# Altium PCB E-25 Microphone.PcbDoc
Units mil, origin at the board's own origin, x right, y up, seen from the top; angles counter-clockwise.
Board outline 646 x 1543 mil, 2 copper layers (Top Layer, Bottom Layer); 21 components, 11 nets, 55 pads, 6 vias.
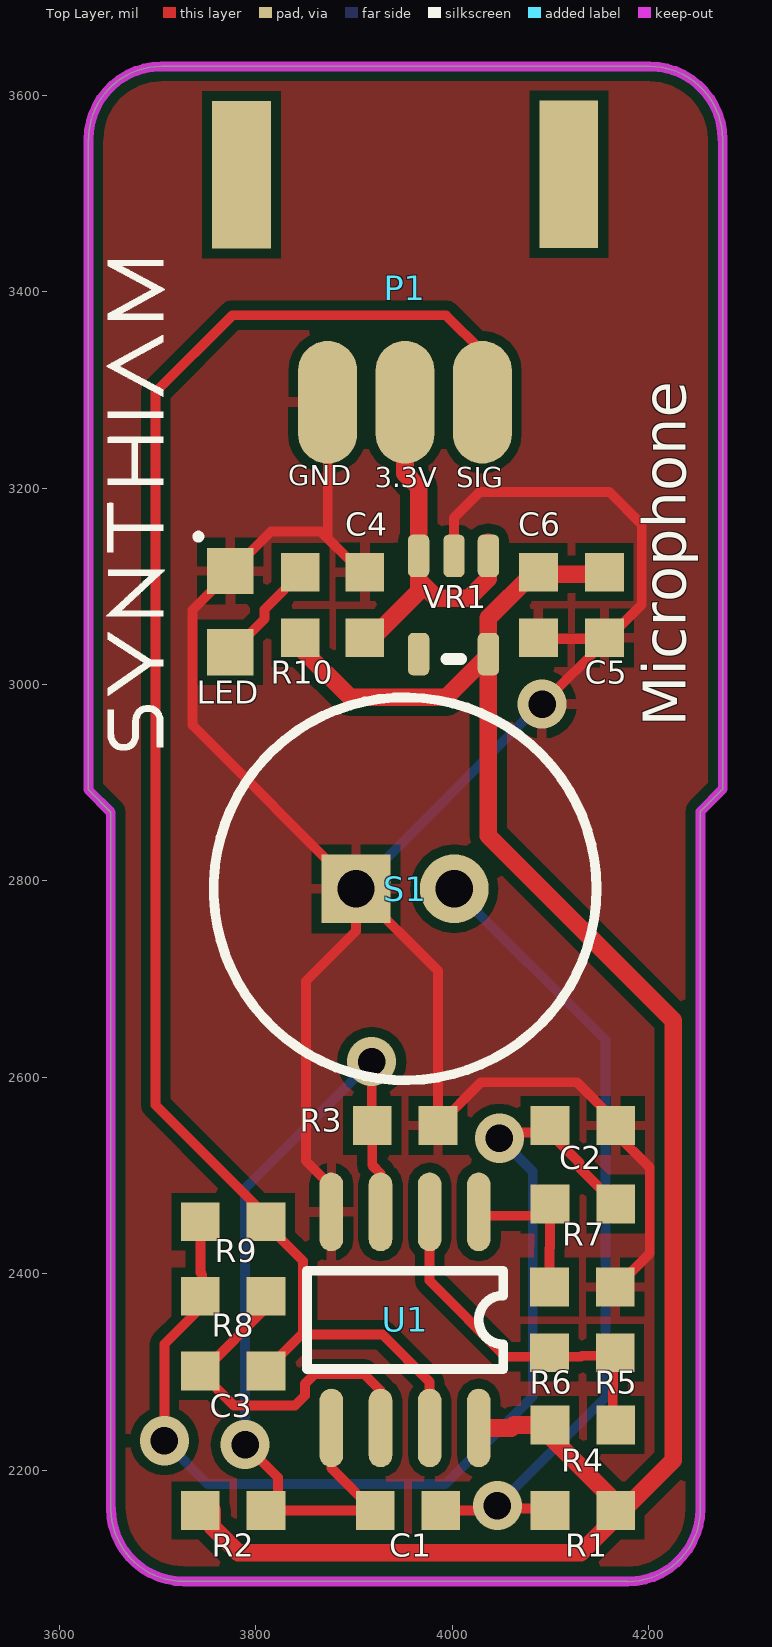
[diagram p0: Top Layer view]
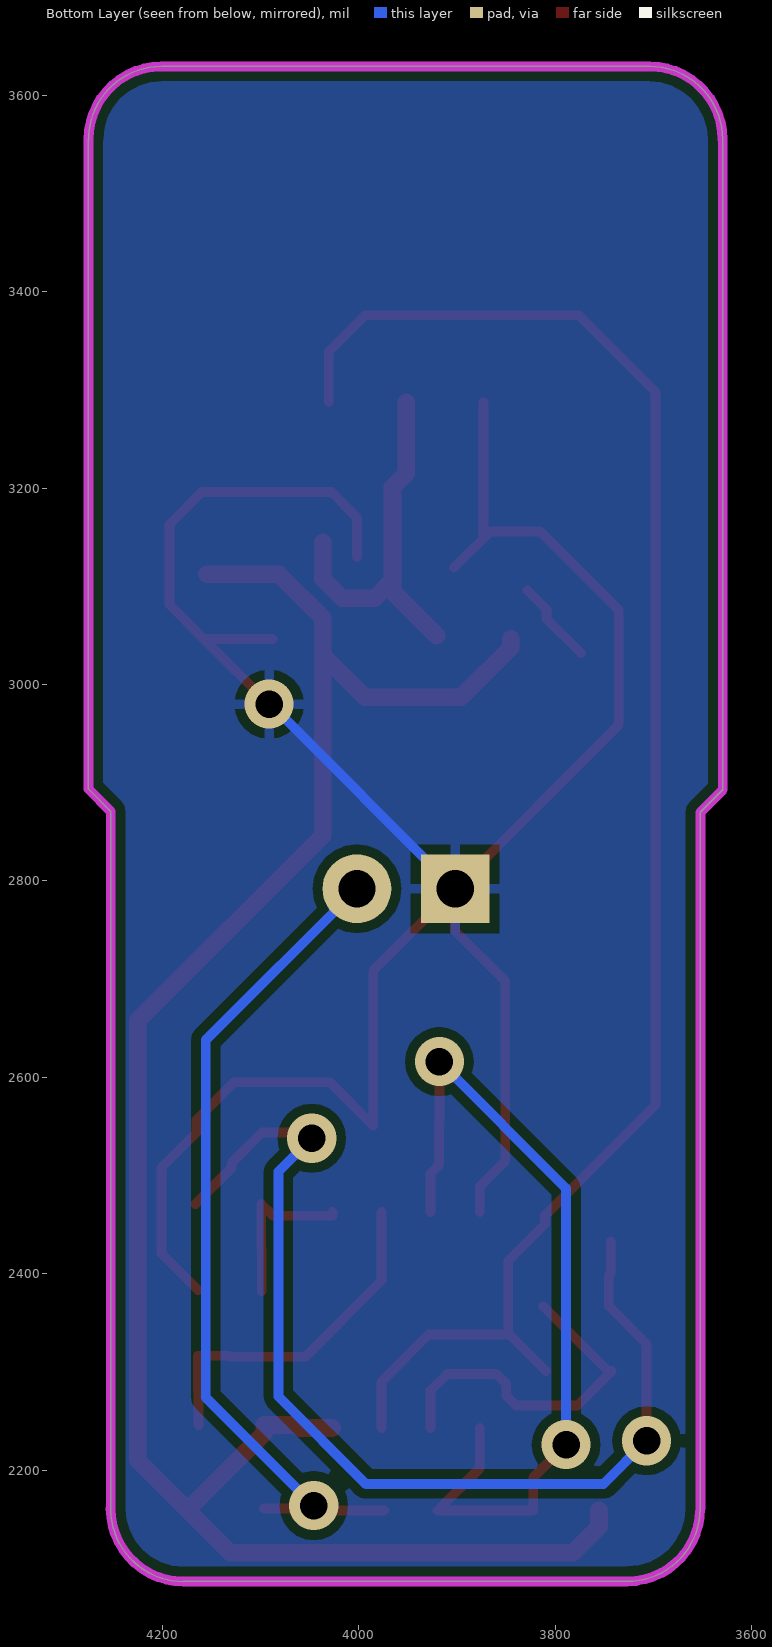
[diagram p1: Bottom Layer view, seen from below]

## Layer stack, top to bottom
Top Layer: signal copper 1.4
Dielectric: dielectric 12.6, FR-4, Dk 4.8
Bottom Layer: signal copper 1.4

## Board outline
3629.5,2892.81 3652.31,2870 3652.31,2161 3652.5,2161 ccw(c3726.81,2161) 3726.81,2086.69 4178.5,2086.69 4178.5,2086.5 ccw(c4178.5,2160.81) 4252.81,2160.81 4252.69,2160.81 4252.69,2870.69 4275.5,2893.5 4275.5,3555.19 4275.31,3555.19 ccw(c4201,3555.19) 4201,3629.5 3704,3629.5 ccw(c3704,3555.19) 3629.69,3555.19 3629.5,3555.19

## Design rules (kind name [scope] priority, off if disabled: settings)
Clearance [All] p1: gap=7
PolygonConnect [All] p1: connectstyle=Relief reliefconductorwidth=10 reliefentries=4 polygonreliefangle="90 Angle"
RoutingVias [All] p1: holewidth=28 width=50 viastyle="Through Hole" minholewidth=28 minwidth=50 maxholewidth=28 maxwidth=50
SilkscreenOverComponentPads [All] p1: minsilkscreentomaskgap=10
SolderMaskExpansion [All] p1: expansion=4
Width Width_2 [InNet('VIN')] p1: maxlimit=25 minlimit=10 preferedwidth=18 minimp=50.000000 maximp=50.000000 favimp=50.000000
Width Width_1 [InNet('VCC')] p2: maxlimit=25 minlimit=10 preferedwidth=18 minimp=50.000000 maximp=50.000000 favimp=50.000000
Width [All] p3: maxlimit=10 minlimit=10 preferedwidth=10
27 further rules are at their usual default settings.

## Components (designator, comment, footprint, x,y, rotation, side; value= is the part's Value field where it differs from the comment)
C1 "18pF" "0603 TIGHT" 3955,2159 r0 top
C2 "1nF" "0603 TIGHT" 4133,2551 r180 top
C3 "18pF" "0603 TIGHT" 3777,2301 r180 top
C4 "2.2uF" "0603 TIGHT" 3911,3081 r90 top
C5 "100nF" "0603 TIGHT" 4155,3081 r270 top
C6 "100nF" "0603 TIGHT" 4087.84,3081 r270 top
LED "LED2" "0805 LED - TIGHT" 3774,3101.86 r90 top
P1 "JST 3-pin" "JST-PH 3-pin SMD" 3952,3403.5 r0 top
R1 "Res1" "0603 TIGHT" 4133,2159 r0 top
R2 "Res1" "0603 TIGHT" 3777,2159 r180 top
R3 "Res1" "0603 TIGHT" 3952,2551 r180 top
R4 "Res1" "0603 TIGHT" 4133,2246 r180 top
R5 "Res1" "0603 TIGHT" 4166,2353 r270 top
R6 "Res1" "0603 TIGHT" 4099,2353 r270 top
R7 "Res1" "0603 TIGHT" 4133,2471 r180 top
R8 "Res1" "0603 TIGHT" 3777,2377 r180 top
R9 "Res1" "0603 TIGHT" 3777,2453 r180 top
R10 "Res1" "0603 TIGHT" 3845.36,3081 r270 top
S1 "Microphone" MICROPHONE 3952,2792 r0 top
U1 "OPA2345" SO-8 4027,2463 r270 top
VR1 "3.3VREG" "SOT-25 New" 4001.82,3074 r0 top

## Footprints (in the part's own frame and the unit in brackets; to place one, negate y for a bottom-side part, rotate by r counter-clockwise, add the part's x,y. Pads: shape width x height; smd on the part's side, far side on the other; paste and mask are expansions set on the pad)
"0603 TIGHT" [mm]
  rect 1x1 smd: 1(-0.85,0) 2(0.85,0)
"0805 LED - TIGHT" [mm] "SMT LED; 2 Flat Leads; Lite-Oon LTST-C170CKT"
  rect 1.2x1.2 smd: 1(-1.75,0) 2(0.35,0)
  silkscreen extent 1.21,0.8 1.26,0.85
"JST-PH 3-pin SMD" [mil]
  rect 60x150 smd: 0(-166.71,115.62) 0(166.71,116.02)
  oval 60x125 smd: 1(-78.82,-116.02) 2(-0.08,-116.02) 3(78.66,-116.02)
MICROPHONE [mil]
  rect 70x70 hole 38: 1(-50,0)
  round 70 hole 38: 2(50,0)
  silkscreen extent -195,-195 195,195
SO-8 [mil]
  oval 80x24 smd: 1(0,0) 2(0,-50) 3(0,-100) 4(0,-150) 5(220,-150) 6(220,-100) 7(220,-50) 8(220,0)
  silkscreen extent 60,-175 160,25
"SOT-25 New" [mm]
  rrect50% 0.55x1.1 smd: 1(-0.914,-1.092) 2(0.889,-1.092) 3(0,1.448) 4(-0.914,1.448) 5(0.889,1.448)
  silkscreen extent -0.2,-1.22 0.18,-1.22

## Part data
C1 C2 C3 C4 C5 C6: library part Cap, "Capacitor"
LED: library part LED1, "Typical RED GaAs LED"
P1: library part "Header 3", "Header, 3-Pin"
R1 R2 R3 R4 R5 R6 R7 R8 R9 R10: "Resistor"
S1: library part MIC
VR1: library part "Vreg SOT25"

## Free pads (board coordinates)
  round 225 on Bottom Solder: 0(3952,2332.5)

## Via types
v1: diameter 50, hole 28, Top Layer to Bottom Layer, tented both sides, 6 vias

## Nets (pads, with @x,y where several pads share a name; then routed paths per layer and width w, separated by ;. In a path a pad name is that pad's centre, name@x,y a point inside that pad or via, vN(x,y) a via of type N, cw(c..) or ccw(c..) an arc to the next point about the centre after c; other vN are vias at no path point)
GND: C2.1 C4.2 C5.2 C6.2 LED.2 P1.1 R3.1 R5.1 S1.1 U1.4 VR1.3 | length 2579.6
  Top Layer w10: 3873.18,3149 P1.1 ; U1.4 3877,2489 3851,2515 3851,2698 3902,2749 S1.1 ; C4.2@3903.09,3119.09 3866.18,3156 3815.36,3156 3735.38,3076.02 3735.38,2958.62 S1.1 ; VR1.3@4001.82,3130 4001.82,3169.82 4028,3196 4160,3196 4193,3163 4193,3081.54 C5.2@4158,3046.54 ; C6.2@4087.84,3046.54 C5.2@4158,3046.54 ; v1(4091.46,2980) C5.2@4158,3046.54 ; R5.1@4164,2383.46 4201.15,2420.61 4201.15,2508.31 4165.46,2544 4165.46,2556.54 4127,2595 4029.46,2595 R3.1 3985.46,2708.54 S1.1
  Bottom Layer w10: S1.1 4090,2980 v1(4091.46,2980)
NetC1_1: C1.1 R2.1 R3.2 U1.3 U1.5 | length 880.4
  Top Layer w10: v1(3789,2226) 3822.46,2192.54 3822.46,2159 3920,2159 3877,2202 U1.5 ; v1(3918,2616) 3918,2551.54 R3.2 3918.54,2510.46 3927,2502 U1.3
  Bottom Layer w10: v1(3789,2226) 3789,2487 v1(3918,2616)
NetC1_2: C1.2 R1.1 S1.2 | length 860.3
  Top Layer w10: C1.2@3974.46,2159 C1.2 4034,2159 4036,2161 R1.1@4096.54,2161
  Bottom Layer w10: S1.2 4156,2638 4156,2274 v1(4046,2164)
NetC2_2: C2.2 R7.1 R8.2 R9.2 | length 1081.1
  Top Layer w10: v1(3707,2230) 3707,2328.46 3745.54,2367 3745.54,2399 3743.54,2401 3743.54,2433 ; v1(4048,2538) 4054,2544 4098.54,2544 4129.46,2513.07 4129.46,2508 R7.1
  Bottom Layer w10: v1(3707,2230) 3751,2186 3993,2186 4082,2275 4082,2504 v1(4048,2538)
NetC3_2: C3.2 R8.1 U1.6 | length 361.6
  Top Layer w10: R8.1@3812.46,2367 3746.46,2301 3742.54,2301 3777.54,2266 3840,2266 3850,2276 3850,2288 3860,2298 3910,2298 3927,2281 U1.6
NetLED_1: LED.1 R10.1 | length 86.4
  Top Layer w10: LED.1@3774,3031.96 3809,3066.96 3809,3076.58 R10.1@3828.32,3095.9
NetR4_1: R4.1 R5.2 R6.2 U1.2 | length 360.3
  Top Layer w10: U1.2 3977,2393 4054.46,2315.54 4131,2315.54 4132,2316.54 4164,2316.54 4164,2281.54 4163.46,2281 R4.1@4163.46,2246
NetR6_1: R6.1 R7.2 U1.1 | length 170.1
  Top Layer w10: U1.1 4027,2459.11 4087.64,2459.11 R7.2 4099.54,2426.54 4099,2426 R6.1@4099,2382.46
SIG: C3.1 P1.3 R9.1 U1.7 | length 1704.3
  Top Layer w10: C3.1@3809.46,2301 3848,2339.54 3848,2413 3810.46,2450.54 3810.46,2459.54 3698,2572 3698,3298 3776,3376 3993.66,3376 4030.66,3339 P1.3 ; 3846.46,2338 3929,2338 3977,2290 U1.7
VCC: C5.1 C6.1 R1.2 R2.2 R4.2 R10.2 U1.8 VR1.2 | length 2028.3
  Top Layer w18: R2.2@3755.54,2159 3755.54,2142.46 3782,2116 4131,2116 4225.15,2210.15 4225.15,2657.85 4036.82,2846.18 VR1.2@4036.82,3030 ; R10.2@3845.36,3046.54 3845.36,3037.64 3896,2987 3993.82,2987 VR1.2@4036.82,3030 ; U1.8 4060,2243 4063,2246 4096.54,2246 4096.54,2237.46 R1.2@4168.23,2165.77 ; C5.1@4155,3112.46 4081.46,3112.46 4036.82,3067.82 VR1.2@4036.82,3030
VIN: C4.1 P1.2 VR1.4 VR1.5 | length 409.4
  Top Layer w18: C4.1@3921,3050 3965.82,3094.82 VR1.4@3965.82,3130 ; P1.2 3951.92,3214.91 3965.82,3201 VR1.4@3965.82,3130 ; VR1.5@4036.82,3144.82 4036.82,3130 4036.82,3107.82 4017,3088 3984,3088 3965.82,3106.18 VR1.4@3965.82,3130
pads on no net: P1.0 VR1.1

## Polygon pours and split planes (outlines as drawn)
GND on Bottom Layer "btm-GND" (solid, pour order 5): 3629.5,2894.81 3652.31,2872 3652.31,2163 3652.5,2163 ccw(c3726.81,2163) 3726.81,2088.69 4178.5,2088.69 4178.5,2088.5 ccw(c4178.5,2162.81) 4252.81,2162.81 4252.69,2162.81 4252.69,2872.69 4275.5,2895.5 4275.5,3557.19 4275.31,3557.19 ccw(c4201,3557.19) 4201,3631.5 3704,3631.5 ccw(c3704,3557.19) 3629.69,3557.19 3629.5,3557.19
GND on Top Layer "Top-GND" (solid, pour order 3): 3629.5,2892.81 3652.31,2870 3652.31,2161 3652.5,2161 ccw(c3726.81,2161) 3726.81,2086.69 4178.5,2086.69 4178.5,2086.5 ccw(c4178.5,2160.81) 4252.81,2160.81 4252.69,2160.81 4252.69,2870.69 4275.5,2893.5 4275.5,3555.19 4275.31,3555.19 ccw(c4201,3555.19) 4201,3629.5 3704,3629.5 ccw(c3704,3555.19) 3629.69,3555.19 3629.5,3555.19

## Keep-outs
Keep-Out Layer:
  lines w10: 3629.5,3555.19 3629.5,2892.81 3652.31,2870 3652.31,2161 ; 3629.69,3555.19 cw(c3704,3555.19) 3704,3629.5 4201,3629.5 cw(c4201,3555.19) 4275.31,3555.19 ; 3652.5,2161 ccw(c3726.81,2161) 3726.81,2086.69 4178.5,2086.69 ; 4178.5,2086.5 ccw(c4178.5,2160.81) 4252.81,2160.81 ; 4252.69,2160.81 4252.69,2870.69 4275.5,2893.5 4275.5,3555.19

## Silkscreen, mask and mechanical layers (free items; w line width, h text height)
Top Overlay:
  drawing of 2260 lines, arcs and shapes, not listed
  text "GND" at 3833,3196 h35
  text "3.3V" at 3921,3194 h35
  text "SIG" at 4004,3194 h35
  text "Microphone" at 4252,2957 h75 r90
Bottom Solder:
  text ":)" at 3919.52,3534.5 h150 r270